# Altium PCB BCM_ECU_revA_V3.PcbDoc (part 5 of 7)
Units mm, origin at the board's own origin, x right, y up, seen from the top; angles counter-clockwise.
Board outline 109.5 x 156 mm, 4 copper layers (TOP SIG, GND, PWR, BOT SIG), stack 0.603 mm thick; 580 components, 446 nets, 1965 pads, 870 vias.
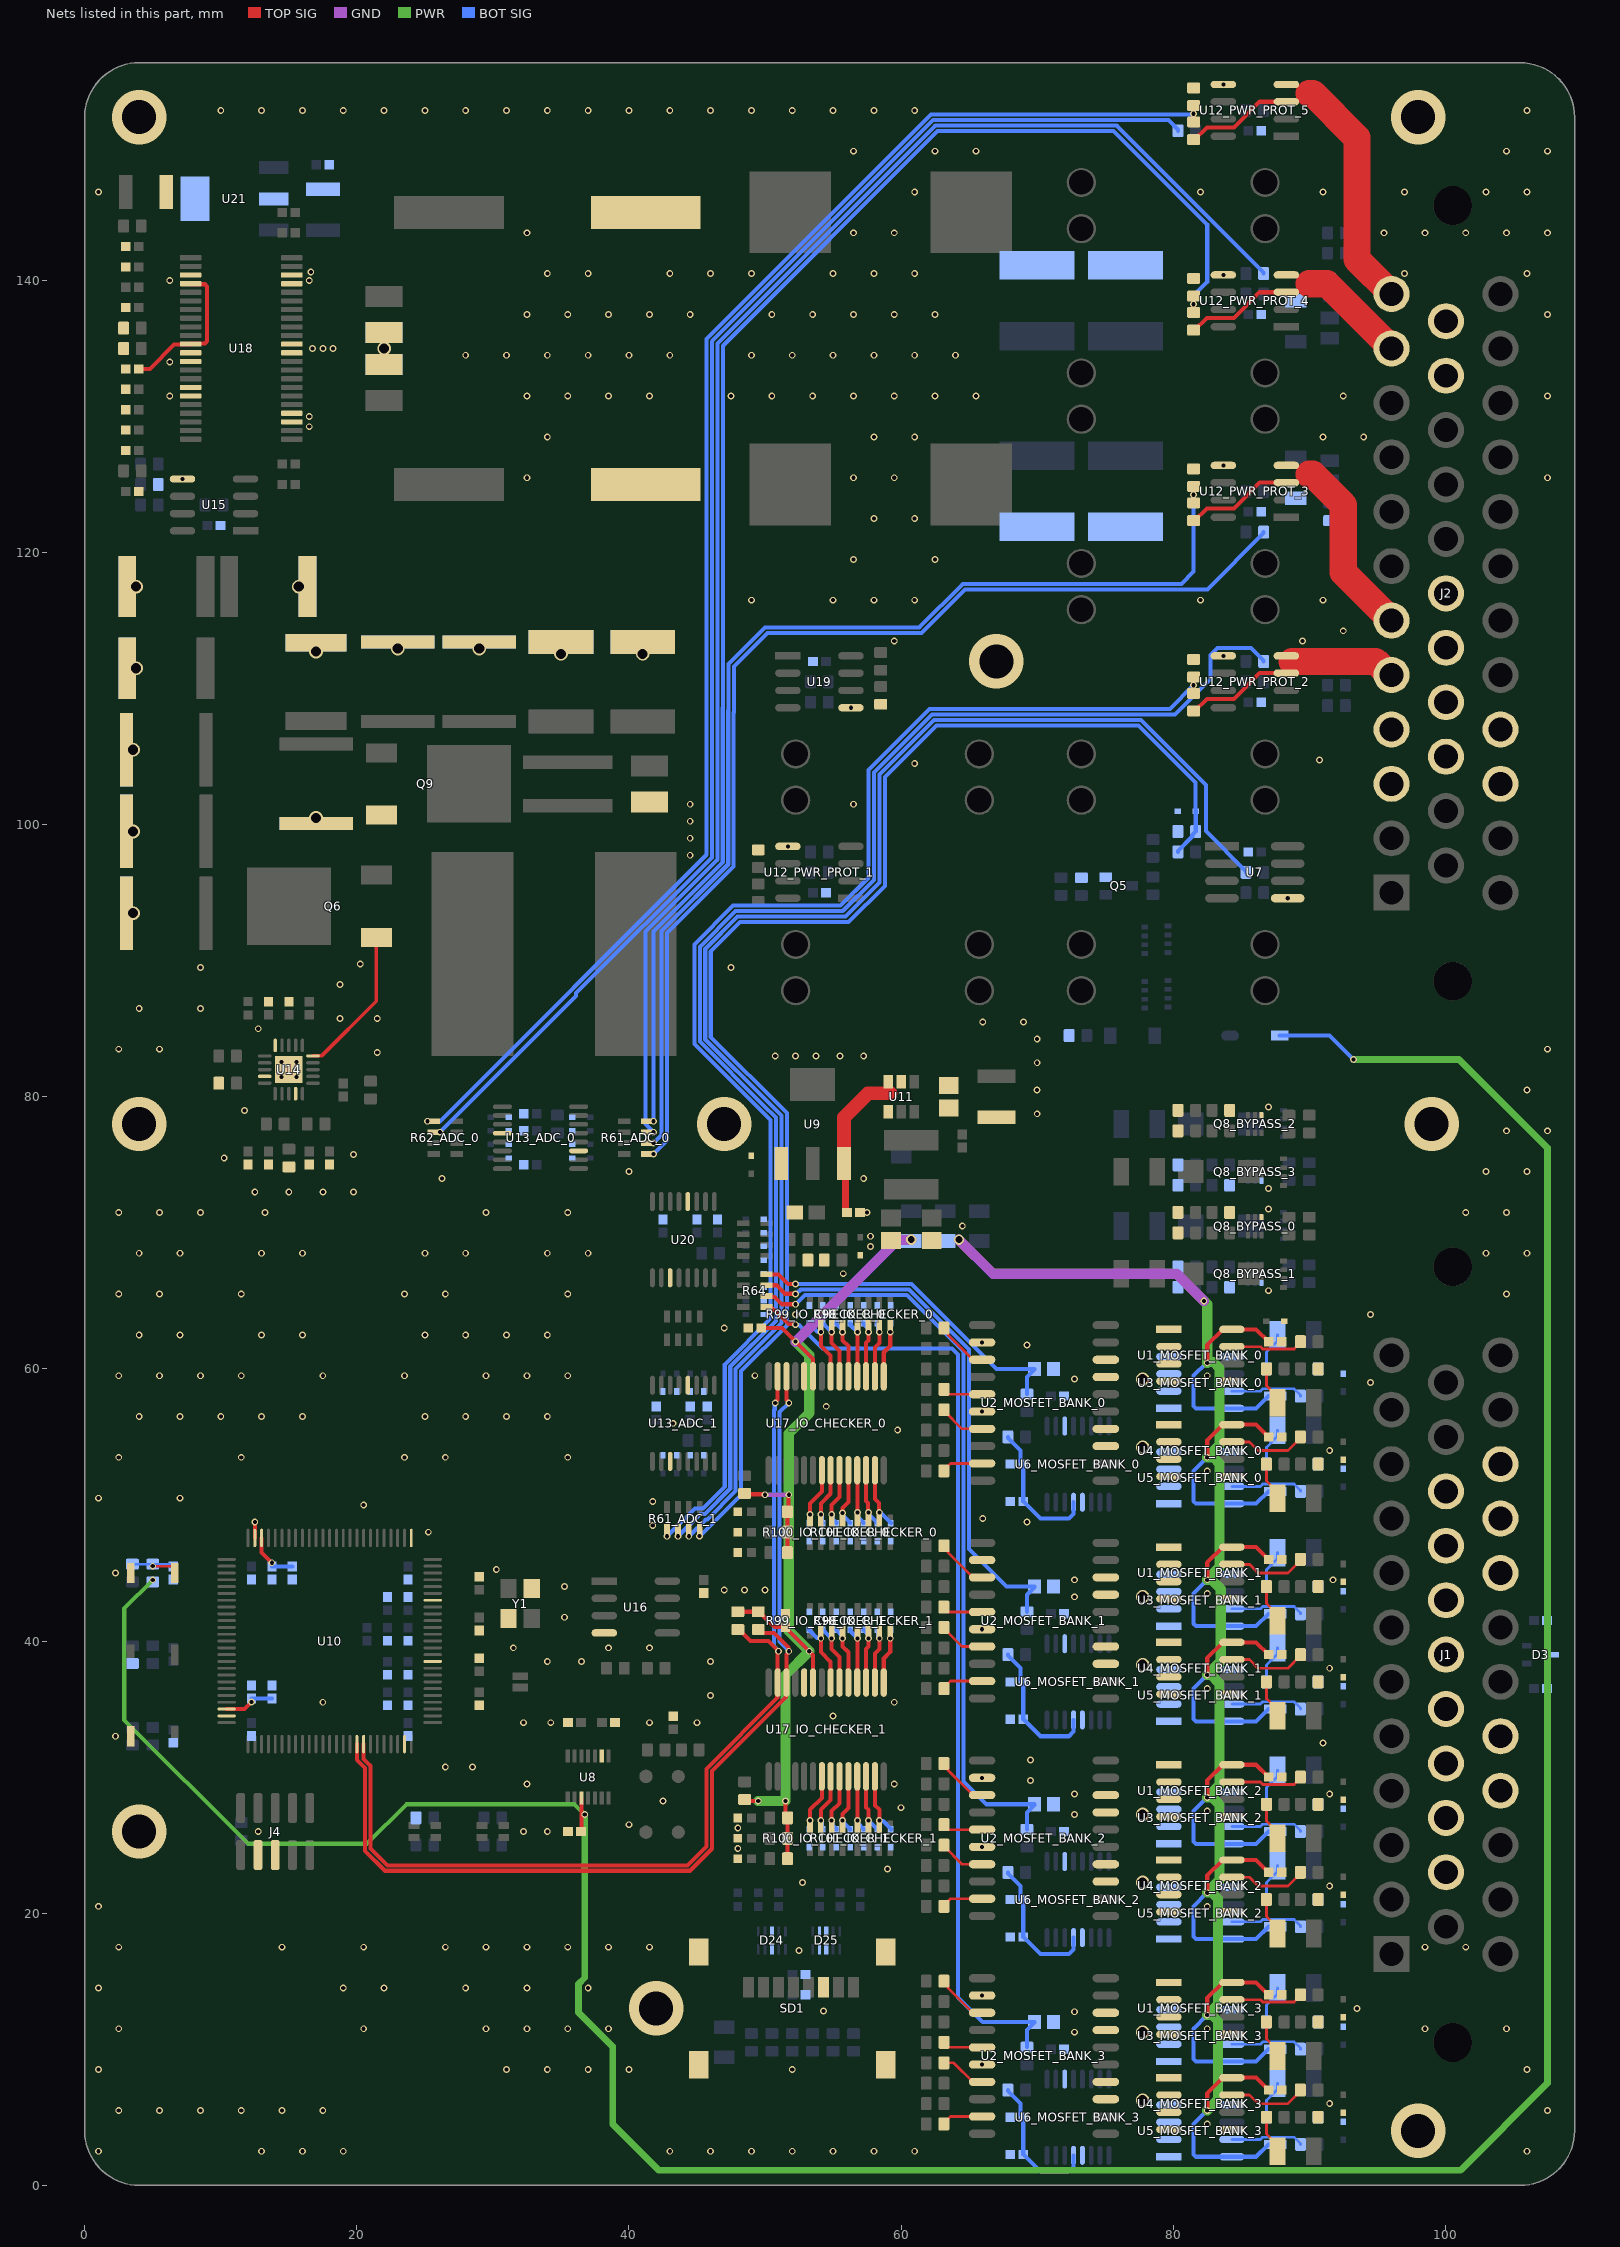
[diagram p6: the nets of this part, all layers, seen from the top]

## Via types
v1: diameter 0.5, hole 0.3, TOP SIG to BOT SIG, tented both sides, 797 vias
v2: diameter 1, hole 0.75, TOP SIG to BOT SIG, tented both sides, 56 vias
v3: diameter 4, hole 2.5, TOP SIG to BOT SIG, 9 vias
v4: diameter 0.75, hole 0.5, TOP SIG to BOT SIG, tented both sides, 6 vias
v5: diameter 2, hole 1.75, TOP SIG to BOT SIG, tented both sides, 2 vias

## Nets (pads, with @x,y where several pads share a name; then routed paths per layer and width w, separated by ;. In a path a pad name is that pad's centre, name@x,y a point inside that pad or via, vN(x,y) a via of type N, cw(c..) or ccw(c..) an arc to the next point about the centre after c; other vN are vias at no path point) (continued)
GND: C1_MOSFET_BANK_0.2 C1_MOSFET_BANK_1.2 C1_MOSFET_BANK_2.2 C1_MOSFET_BANK_3.2 C2_MOSFET_BANK_0.2 C2_MOSFET_BANK_1.2 C2_MOSFET_BANK_2.2 C2_MOSFET_BANK_3.2 C3_MOSFET_BANK_0.2 C3_MOSFET_BANK_1.2 C3_MOSFET_BANK_2.2 C3_MOSFET_BANK_3.2 C4_MOSFET_BANK_0.2 C4_MOSFET_BANK_1.2 C4_MOSFET_BANK_2.2 C4_MOSFET_BANK_3.2 C5_MOSFET_BANK_0.2 C5_MOSFET_BANK_1.2 C5_MOSFET_BANK_2.2 C5_MOSFET_BANK_3.2 C6_MOSFET_BANK_0.2 C6_MOSFET_BANK_1.2 C6_MOSFET_BANK_2.2 C6_MOSFET_BANK_3.2 C7_MOSFET_BANK_0.2 C7_MOSFET_BANK_1.2 C7_MOSFET_BANK_2.2 C7_MOSFET_BANK_3.2 C8.2 C9.2 C10.2 C11.2 C12.2 C13.2 C14.1 C15.2 C16.2 C17.1 C18.2 C19.2 C20.2 C21.2 C23.2 C24.2 C25.2 C26.2 C27.2 C28.2 C29.2 C30.2 C31.2 C32.2 C33.2 C34.2 C35.2 C36.2 C37.2 C38.2 C39.2 C40_PWR_PROT_1.2 C40_PWR_PROT_2.2 C40_PWR_PROT_3.2 C40_PWR_PROT_4.2 C40_PWR_PROT_5.2 C41.1 C43_IO_CHECKER_0.2 C43_IO_CHECKER_1.2 C46.2 C47.2 C48.2 C49_ADC_0.2 C49_ADC_1.2 C50_ADC_0.2 C50_ADC_1.2 C51_ADC_0.2 C51_ADC_1.2 C53.2 C54.2 C55.2 C56.2 C57.2 C58.2 C59.2 C60.2 C61.2 C62.2 C64.2 C65.2 C66.2 C67.2 C68.2 C69.2 C70.2 C71.2 C72.2 C73.2 C74.2 C75.2 C76.2 C77.2 C79.2 C83.2 C84.2 C85.2 C87.1 C88.2 C89.2 C90.2 C91.1 C92.2 C93.2 C94.2 C95.1 C96.2 C97.1 C98.1 C99.1 C100.1 C101.1 C102.2 C103.2 C104.2 C105.2 C106.2 C107.2 C108.2 C109.2 C110.2 C111.2 C112.2 C113.2 C114.2 C115.2 C116.2 C117.1 C118.2 C119.1 C120.1 D3.3 D6_PWR_PROT_1.2 D6_PWR_PROT_2.2 D6_PWR_PROT_3.2 D6_PWR_PROT_4.2 D6_PWR_PROT_5.2 D8.2 D9_IO_CHECKER_0.2 D9_IO_CHECKER_1.2 D10_IO_CHECKER_0.2 D10_IO_CHECKER_1.2 D11_IO_CHECKER_0.2 D11_IO_CHECKER_1.2 D12_IO_CHECKER_0.2 D12_IO_CHECKER_1.2 D13_IO_CHECKER_0.2 D13_IO_CHECKER_1.2 D14_IO_CHECKER_0.2 D14_IO_CHECKER_1.2 D15_IO_CHECKER_0.2 D15_IO_CHECKER_1.2 D16_IO_CHECKER_0.2 D16_IO_CHECKER_1.2 D17_IO_CHECKER_0.2 D17_IO_CHECKER_1.2 D18_IO_CHECKER_0.2 D18_IO_CHECKER_1.2 D19_IO_CHECKER_0.2 D19_IO_CHECKER_1.2 D20_IO_CHECKER_0.2 D20_IO_CHECKER_1.2 D21_IO_CHECKER_0.2 D21_IO_CHECKER_1.2 D22_IO_CHECKER_0.2 D22_IO_CHECKER_1.2 D23.2 D24.3 D24.8 D25.2 D25.3 D25.8 D25.9 D26_ADC_0.2 D26_ADC_1.2 D27_ADC_0.2 D27_ADC_1.2 D28_ADC_0.2 D28_ADC_1.2 D29_ADC_0.2 D29_ADC_1.2 D30_ADC_0.2 D30_ADC_1.2 D31_ADC_0.2 D31_ADC_1.2 D32_ADC_0.2 D32_ADC_1.2 D33_ADC_0.2 D33_ADC_1.2 D34.2 D35.2 D36.2 D37.2 D38.2 D39.2 D40.2 D41_MOSFET_BANK_0.2 D41_MOSFET_BANK_1.2 D41_MOSFET_BANK_2.2 D41_MOSFET_BANK_3.2 D42_MOSFET_BANK_0.2 D42_MOSFET_BANK_1.2 D42_MOSFET_BANK_2.2 D42_MOSFET_BANK_3.2 D43_MOSFET_BANK_0.2 D43_MOSFET_BANK_1.2 D43_MOSFET_BANK_2.2 D43_MOSFET_BANK_3.2 D44_MOSFET_BANK_0.2 D44_MOSFET_BANK_1.2 D44_MOSFET_BANK_2.2 D44_MOSFET_BANK_3.2 D45.2 D46.2 D47.2 J1.14 J1.15 J1.16 J1.17 J1.18 J1.19 J1.20 J1.21 J1.27 J1.28 J1.31 J1.32 J1.33 J2.3 J2.4 J2.15 J2.16 J2.17 J2.18 J2.22 J2.23 J2.26 J2.27 J4.3 J4.5 Q5.2 Q8_BYPASS_0.1 Q8_BYPASS_1.1 Q8_BYPASS_2.1 Q8_BYPASS_3.1 Q9.3 R11_MOSFET_BANK_0.1 R11_MOSFET_BANK_1.1 R11_MOSFET_BANK_2.1 R11_MOSFET_BANK_3.1 R22_MOSFET_BANK_0.2 R22_MOSFET_BANK_1.2 R22_MOSFET_BANK_2.2 R22_MOSFET_BANK_3.2 R23_MOSFET_BANK_0.2 R23_MOSFET_BANK_1.2 R23_MOSFET_BANK_2.2 R23_MOSFET_BANK_3.2 R24_MOSFET_BANK_0.2 R24_MOSFET_BANK_1.2 R24_MOSFET_BANK_2.2 R24_MOSFET_BANK_3.2 R25_MOSFET_BANK_0.2 R25_MOSFET_BANK_1.2 R25_MOSFET_BANK_2.2 R25_MOSFET_BANK_3.2 R27.1 R31.1 R32.1 R41.1 R45.1 R49_PWR_PROT_1.2 R49_PWR_PROT_2.2 R49_PWR_PROT_3.2 R49_PWR_PROT_4.2 R49_PWR_PROT_5.2 R51.2 R57_BYPASS_0.2 R57_BYPASS_1.2 R57_BYPASS_2.2 R57_BYPASS_3.2 R59_BYPASS_0.1 R59_BYPASS_1.1 R59_BYPASS_2.1 R59_BYPASS_3.1 R93.2 R94.2 R102_IO_CHECKER_0.1 R102_IO_CHECKER_1.1 R103_IO_CHECKER_0.1 R103_IO_CHECKER_1.1 R104_IO_CHECKER_0.1 R104_IO_CHECKER_1.1 R106.2 R110.2 R126.2 R130.1 R131.1 R132.2 R133.2 SD1.6 SD1.9 SD1.10 SD1.11 SD1.12 SW1.1 SW3.2 U1_MOSFET_BANK_0.5 U1_MOSFET_BANK_1.5 U1_MOSFET_BANK_2.5 U1_MOSFET_BANK_3.5 U2_MOSFET_BANK_0.2 U2_MOSFET_BANK_0.6 U2_MOSFET_BANK_1.2 U2_MOSFET_BANK_1.6 U2_MOSFET_BANK_2.2 U2_MOSFET_BANK_2.6 U2_MOSFET_BANK_3.2 U2_MOSFET_BANK_3.6 U3_MOSFET_BANK_0.5 U3_MOSFET_BANK_1.5 U3_MOSFET_BANK_2.5 U3_MOSFET_BANK_3.5 U4_MOSFET_BANK_0.5 U4_MOSFET_BANK_1.5 U4_MOSFET_BANK_2.5 U4_MOSFET_BANK_3.5 U5_MOSFET_BANK_0.5 U5_MOSFET_BANK_1.5 U5_MOSFET_BANK_2.5 U5_MOSFET_BANK_3.5 U6_MOSFET_BANK_0.3 U6_MOSFET_BANK_0.12 U6_MOSFET_BANK_1.3 U6_MOSFET_BANK_1.12 U6_MOSFET_BANK_2.3 U6_MOSFET_BANK_2.12 U6_MOSFET_BANK_3.3 U6_MOSFET_BANK_3.12 U7.5 U8.2 U9.1 U10.10 U10.19 U10.26 U10.49 U10.74 U10.99 U11.4 U12_PWR_PROT_1.5 U12_PWR_PROT_2.5 U12_PWR_PROT_3.5 U12_PWR_PROT_4.5 U12_PWR_PROT_5.5 U13_ADC_0.3 U13_ADC_0.12 U13_ADC_1.3 U13_ADC_1.12 U14.10 U14.14 U14.19 U14.21 U15.5 U16.4 U17_IO_CHECKER_0.10 U17_IO_CHECKER_1.10 U18.3 U18.12 U18.13 U18.16 U18.17 U18.25 U18.26 U18.33 U18.34 U18.41 U18.42 U19.5 U20.3 U20.12 U21.2 U21.4 Y1.2 Y1.4 | length 1.2
  TOP SIG w0.3: U10.49@12.5,47.575 v1(12.5,48.75)
  other v1: 1,2.5 13,2.5 16,2.5 19,2.5 43,2.5 46,2.5 49,2.5 52,2.5 55,2.5 58,2.5 61,2.5 106,2.5 82.5,4.5 2.5,5.5 5.5,5.5 8.5,5.5 11.5,5.5 14.5,5.5 17.5,5.5 107.5,5.5 91.5,6 1,8.5 31,8.5 34,8.5 37,8.5 40,8.5 52,8.5 106,8.5 65.95,8.865 72.75,11.25 2.5,11.5 20.5,11.5 29.5,11.5 32.5,11.5 35.5,11.5 38.5,11.5 82.5,11.5 98.5,11.5 104.5,11.5 72.75,12.75 54.295,12.8 93.5,13 65.95,13.945 1,14.5 19,14.5 22,14.5 28,14.5 32.5,14.5 37,14.5 52.5,17.25 2.5,17.5 14.5,17.5 20.5,17.5 26.5,17.5 29.5,17.5 32.5,17.5 35.5,17.5 38.5,17.5 41.5,17.5 98.5,17.5 101.5,17.5 1,20.5 82.5,20.5 91.5,22 52.75,22.25 59,23.25 48,24.75 65.95,24.865 12.75,26 32.25,26 34,26 48,26.25 40,26.5 72.75,27.25 82.5,27.5 60,27.75 42.5,28.25 72.75,28.75 91.5,28.75 32.5,29.5 59.5,29.5 69.5,29.75 65.95,29.945 26.5,30.75 28.5,30.75 69.5,31.25 91,32.5 2.25,33 32.25,34 34.25,34 41.5,34 45,34 55,34.5 17.5,35.5 59.5,35.5 46,36 82.5,36.5 91.5,38 34,38.5 36.5,38.5 46,38.5 31.5,39.5 38.5,39.5 41.5,39.5 65.95,40.865 35.25,41.75 72.75,43.25 82.5,43.5 47,43.75 48.5,43.75 50,43.75 35.25,44 72.75,44.5 91.75,44.5 2.25,45 30.25,45.25 25.25,48 41.75,48.5 69.25,48.75 66,49 20.5,50 41.75,50.25 1,50.5 7,50.5 82.5,52.5 2.5,53.5 11.5,53.5 23.5,53.5 26.5,53.5 35.5,53.5 91.5,54 59.75,55.5 43.25,56 4,56.5 7,56.5 10,56.5 13,56.5 16,56.5 25,56.5 28,56.5 31,56.5 34,56.5 65.95,56.865 54.5,57.25 94.5,59 72.75,59.25 2.5,59.5 5.5,59.5 8.5,59.5 11.5,59.5 17.5,59.5 23.5,59.5 29.5,59.5 32.5,59.5 35.5,59.5 49.25,59.5 82.5,59.5 69.25,61.75 65.95,61.945 4,62.5 7,62.5 13,62.5 16,62.5 25,62.5 28,62.5 31,62.5 34,62.5 47,63 52.25,64 94.5,64 2.5,65.5 5.5,65.5 11.5,65.5 23.5,65.5 26.5,65.5 35.5,65.5 104.5,65.5 87,65.75 55.75,67 4,68.5 7,68.5 13,68.5 16,68.5 25,68.5 28,68.5 34,68.5 37,68.5 103,68.5 106,68.5 57.75,69 57.75,69.75 64.5,70.5 2.5,71.5 5.5,71.5 8.5,71.5 13.25,71.5 29.5,71.5 35.5,71.5 57.5,71.5 101.5,71.5 104.5,71.5 87,71.75 12.5,73 15,73 17.5,73 19.75,73 87,73.25 26.25,74 57.25,74 40,74.5 103,74.5 106,74.5 10.25,75.5 19.75,75.75 104.5,77.5 107.5,77.5 70,78.75 11.75,79 87,79.25 70,80.5 106,80.5 14.45,81.45 15.55,81.45 70,82.5 14.45,82.55 15.55,82.55 50.75,83 52.25,83 53.75,83 55.5,83 57.25,83 21.5,83.25 2.5,83.5 5.5,83.5 107.5,83.5 70,84.25 12.75,85 66,85.5 69,85.5 18.75,85.75 21.5,85.75 4,86.5 8.5,86.5 18.75,88.25 8.5,89.5 47.5,89.5 20.25,89.75 88.416,94.595 44.5,97.75 51.684,98.405 44.5,99 44.5,100.25 44.5,101.5 56.5,101.5 61,104.5 90.75,104.75 56.316,108.595 83.684,112.405 59.5,113.5 89.5,113.5 92.5,114.25 49,116.5 55,116.5 58,116.5 61,116.5 82,116.5 91,116.5 56.5,119.5 62.5,119.5 58,122.5 61,122.5 7.184,125.405 32.5,125.5 56.5,125.5 59.5,125.5 107.5,125.5 83.684,126.405 34,128.5 58,128.5 61,128.5 91,128.5 94,128.5 16.5,129.25 16.5,130 6.25,131.5 32.5,131.5 35.5,131.5 38.5,131.5 41.5,131.5 47.5,131.5 50.5,131.5 53.5,131.5 56.5,131.5 59.5,131.5 62.5,131.5 65.5,131.5 92.5,131.5 107.5,131.5 6.25,134 28,134.5 31,134.5 34,134.5 37,134.5 40,134.5 43,134.5 49,134.5 52,134.5 55,134.5 58,134.5 61,134.5 64,134.5 16.75,135 17.5,135 18.25,135 32.5,137.5 35.5,137.5 38.5,137.5 41.5,137.5 44.5,137.5 50.5,137.5 53.5,137.5 56.5,137.5 59.5,137.5 62.5,137.5 107.5,137.5 6.25,140 16.5,140 83.684,140.405 34,140.5 37,140.5 43,140.5 46,140.5 49,140.5 55,140.5 58,140.5 61,140.5 97,140.5 106,140.5 16.616,140.616 32.5,143.5 56.5,143.5 59.5,143.5 95.5,143.5 98.5,143.5 101.5,143.5 104.5,143.5 107.5,143.5 1,146.5 61,146.5 82,146.5 91,146.5 97,146.5 103,146.5 106,146.5 56.5,149.5 62.5,149.5 65.5,149.5 104.5,149.5 107.5,149.5 10,152.5 13,152.5 16,152.5 19,152.5 22,152.5 25,152.5 28,152.5 31,152.5 34,152.5 37,152.5 40,152.5 43,152.5 46,152.5 49,152.5 52,152.5 55,152.5 58,152.5 61,152.5 106,152.5 83.684,154.405
  other v2: 3.552,93.5 3.552,99.5 17,100.5 3.552,105.5 3.775,111.5 35,112.55 41,112.55 17,112.725 23,112.948 29,112.948 3.775,117.5 15.725,117.5 22,135
  other v3: 98,4 42,13 4,26 4,78 47,78 99,78 67,112 4,152 98,152
GPA0_IO_CHECKER_0: D19_IO_CHECKER_0.1 R100_IO_CHECKER_0.8 U17_IO_CHECKER_0.21 | length 4.7
  TOP SIG w0.3: R100_IO_CHECKER_0.8@53.3,48.85 v1(53.3,49.3) 53.3,50.1 54.175,50.975 U17_IO_CHECKER_0.21@54.175,52.55
  BOT SIG w0.3: D19_IO_CHECKER_0.1@53.25,48.66 53.275,48.685 53.275,49.275 v1(53.3,49.3)
GPA0_IO_CHECKER_1: D19_IO_CHECKER_1.1 R100_IO_CHECKER_1.8 U17_IO_CHECKER_1.21 | length 4.7
  TOP SIG w0.3: R100_IO_CHECKER_1.8@53.3,26.35 v1(53.3,26.8) 53.3,27.6 54.175,28.475 U17_IO_CHECKER_1.21@54.175,30.05
  BOT SIG w0.3: D19_IO_CHECKER_1.1@53.25,26.16 53.275,26.185 53.275,26.775 v1(53.3,26.8)
GPA1_IO_CHECKER_0: D18_IO_CHECKER_0.1 R100_IO_CHECKER_0.7 U17_IO_CHECKER_0.22 | length 4.7
  TOP SIG w0.3: R100_IO_CHECKER_0.7@54.1,48.85 v1(54.1,49.3) 54.1,50.1 54.825,50.825 U17_IO_CHECKER_0.22@54.825,52.55
  BOT SIG w0.3: v1(54.1,49.3) 54.1,49.246 54.2,49.146 54.2,48.71 D18_IO_CHECKER_0.1@54.25,48.66
GPA1_IO_CHECKER_1: D18_IO_CHECKER_1.1 R100_IO_CHECKER_1.7 U17_IO_CHECKER_1.22 | length 4.7
  TOP SIG w0.3: R100_IO_CHECKER_1.7@54.1,26.35 v1(54.1,26.8) 54.1,27.6 54.825,28.325 U17_IO_CHECKER_1.22@54.825,30.05
  BOT SIG w0.3: v1(54.1,26.8) 54.1,26.746 54.2,26.646 54.2,26.21 D18_IO_CHECKER_1.1@54.25,26.16
GPA2_IO_CHECKER_0: D17_IO_CHECKER_0.1 R100_IO_CHECKER_0.6 U17_IO_CHECKER_0.23 | length 4.7
  TOP SIG w0.3: R100_IO_CHECKER_0.6@54.9,48.85 v1(54.9,49.3) 54.9,50 55.475,50.575 U17_IO_CHECKER_0.23@55.475,52.55
  BOT SIG w0.3: v1(54.9,49.3) 54.938,49.262 54.938,49.012 55.25,48.7 D17_IO_CHECKER_0.1@55.25,48.66
GPA2_IO_CHECKER_1: D17_IO_CHECKER_1.1 R100_IO_CHECKER_1.6 U17_IO_CHECKER_1.23 | length 4.7
  TOP SIG w0.3: R100_IO_CHECKER_1.6@54.9,26.35 v1(54.9,26.8) 54.9,27.5 55.475,28.075 U17_IO_CHECKER_1.23@55.475,30.05
  BOT SIG w0.3: v1(54.9,26.8) 54.938,26.762 54.938,26.512 55.25,26.2 D17_IO_CHECKER_1.1@55.25,26.16
GPA3_IO_CHECKER_0: D16_IO_CHECKER_0.1 R100_IO_CHECKER_0.5 U17_IO_CHECKER_0.24 | length 4.9
  TOP SIG w0.3: R100_IO_CHECKER_0.5@55.7,48.85 55.695,48.855 55.695,49.4 v1(55.69,49.405) 55.69,49.79 56.125,50.225 U17_IO_CHECKER_0.24@56.125,52.55
  BOT SIG w0.3: v1(55.69,49.405) 55.728,49.367 55.728,49.222 56.2,48.75 56.2,48.71 D16_IO_CHECKER_0.1@56.25,48.66
GPA3_IO_CHECKER_1: D16_IO_CHECKER_1.1 R100_IO_CHECKER_1.5 U17_IO_CHECKER_1.24 | length 4.7
  TOP SIG w0.3: R100_IO_CHECKER_1.5@55.7,26.35 v1(55.7,26.8) 55.7,27.3 56.125,27.725 U17_IO_CHECKER_1.24@56.125,30.05
  BOT SIG w0.3: v1(55.7,26.8) 55.7,26.75 56.25,26.2 D16_IO_CHECKER_1.1@56.25,26.16
GPA4_IO_CHECKER_0: D22_IO_CHECKER_0.1 R101_IO_CHECKER_0.8 U17_IO_CHECKER_0.25 | length 4.7
  TOP SIG w0.3: U17_IO_CHECKER_0.25@56.775,52.55 56.787,52.537 56.787,49.467 v1(56.8,49.455) ; v1@56.787,49.455 56.8,49.442 R101_IO_CHECKER_0.8@56.8,48.85
  BOT SIG w0.3: v1(56.8,49.455) 56.838,49.417 56.838,49.112 57.2,48.75 57.2,48.71 D22_IO_CHECKER_0.1@57.25,48.66
GPA4_IO_CHECKER_1: D22_IO_CHECKER_1.1 R101_IO_CHECKER_1.8 U17_IO_CHECKER_1.25 | length 4.5
  TOP SIG w0.3: U17_IO_CHECKER_1.25@56.775,30.05 56.787,30.038 56.787,26.363 R101_IO_CHECKER_1.8@56.8,26.35
  BOT SIG w0.3: v1(56.8,26.8) 56.838,26.762 56.838,26.612 57.25,26.2 D22_IO_CHECKER_1.1@57.25,26.16
GPA5_IO_CHECKER_0: D21_IO_CHECKER_0.1 R101_IO_CHECKER_0.7 U17_IO_CHECKER_0.26 | length 4.8
  TOP SIG w0.3: U17_IO_CHECKER_0.26@57.425,52.55 57.425,50.305 57.575,50.155 57.575,49.48 v1(57.6,49.455) R101_IO_CHECKER_0.7@57.6,48.85
  BOT SIG w0.3: v1(57.6,49.455) 57.638,49.417 57.638,49.312 58.2,48.75 58.2,48.71 D21_IO_CHECKER_0.1@58.25,48.66
GPA5_IO_CHECKER_1: D21_IO_CHECKER_1.1 R101_IO_CHECKER_1.7 U17_IO_CHECKER_1.26 | length 4.7
  TOP SIG w0.3: U17_IO_CHECKER_1.26@57.425,30.05 57.425,27.775 57.6,27.6 v1(57.6,26.8) R101_IO_CHECKER_1.7@57.6,26.35
  BOT SIG w0.3: v1(57.6,26.8) 58.15,26.25 58.2,26.25 58.25,26.2 D21_IO_CHECKER_1.1@58.25,26.16
GPA6_IO_CHECKER_0: D20_IO_CHECKER_0.1 R101_IO_CHECKER_0.6 U17_IO_CHECKER_0.27 | length 5
  TOP SIG w0.3: U17_IO_CHECKER_0.27@58.075,52.55 58.075,50.425 58.362,50.138 58.362,49.493 v1(58.4,49.455) R101_IO_CHECKER_0.6@58.4,48.85
  BOT SIG w0.3: v1(58.4,49.455) 58.438,49.417 58.533,49.417 59.2,48.75 59.2,48.71 D20_IO_CHECKER_0.1@59.25,48.66
GPA6_IO_CHECKER_1: D20_IO_CHECKER_1.1 R101_IO_CHECKER_1.6 U17_IO_CHECKER_1.27 | length 5
  TOP SIG w0.3: U17_IO_CHECKER_1.27@58.075,30.05 58.075,27.925 58.4,27.6 v1(58.4,26.8) R101_IO_CHECKER_1.6@58.4,26.35
  BOT SIG w0.3: v1(58.4,26.8) 58.438,26.762 58.688,26.762 59.25,26.2 D20_IO_CHECKER_1.1@59.25,26.16
GPB0_IO_CHECKER_0: D12_IO_CHECKER_0.1 R98_IO_CHECKER_0.8 U17_IO_CHECKER_0.1 | length 4.6
  TOP SIG w0.3: U17_IO_CHECKER_0.1@58.725,59.45 58.725,61.225 59.2,61.7 v1(59.2,62.7) R98_IO_CHECKER_0.8@59.2,63.15
  BOT SIG w0.3: v1(59.2,62.7) 59.225,62.725 59.225,63.315 D12_IO_CHECKER_0.1@59.25,63.34
GPB0_IO_CHECKER_1: D12_IO_CHECKER_1.1 R98_IO_CHECKER_1.8 U17_IO_CHECKER_1.1 | length 4.6
  TOP SIG w0.3: U17_IO_CHECKER_1.1@58.725,36.95 58.725,38.725 59.2,39.2 v1(59.2,40.2) R98_IO_CHECKER_1.8@59.2,40.65
  BOT SIG w0.3: v1(59.2,40.2) 59.225,40.225 59.225,40.815 D12_IO_CHECKER_1.1@59.25,40.84
GPB1_IO_CHECKER_0: D11_IO_CHECKER_0.1 R98_IO_CHECKER_0.7 U17_IO_CHECKER_0.2 | length 4.5
  TOP SIG w0.3: U17_IO_CHECKER_0.2@58.075,59.45 58.075,61.575 58.4,61.9 v1(58.4,62.7) R98_IO_CHECKER_0.7@58.4,63.15
  BOT SIG w0.3: D11_IO_CHECKER_0.1@58.25,63.34 58.3,63.29 58.3,62.854 58.4,62.754 v1(58.4,62.7)
GPB1_IO_CHECKER_1: D11_IO_CHECKER_1.1 R98_IO_CHECKER_1.7 U17_IO_CHECKER_1.2 | length 4.5
  TOP SIG w0.3: U17_IO_CHECKER_1.2@58.075,36.95 58.075,39.075 58.4,39.4 v1(58.4,40.2) R98_IO_CHECKER_1.7@58.4,40.65
  BOT SIG w0.3: D11_IO_CHECKER_1.1@58.25,40.84 58.3,40.79 58.3,40.354 58.4,40.254 v1(58.4,40.2)
GPB2_IO_CHECKER_0: D10_IO_CHECKER_0.1 R98_IO_CHECKER_0.6 U17_IO_CHECKER_0.3 | length 4.6
  TOP SIG w0.3: U17_IO_CHECKER_0.3@57.425,59.45 57.425,61.925 57.6,62.1 v1(57.6,62.7) R98_IO_CHECKER_0.6@57.6,63.15
  BOT SIG w0.3: D10_IO_CHECKER_0.1@57.25,63.34 57.25,63.3 57.562,62.988 57.562,62.738 v1(57.6,62.7)
GPB2_IO_CHECKER_1: D10_IO_CHECKER_1.1 R98_IO_CHECKER_1.6 U17_IO_CHECKER_1.3 | length 4.6
  TOP SIG w0.3: U17_IO_CHECKER_1.3@57.425,36.95 57.425,39.425 57.6,39.6 v1(57.6,40.2) R98_IO_CHECKER_1.6@57.6,40.65
  BOT SIG w0.3: D10_IO_CHECKER_1.1@57.25,40.84 57.25,40.8 57.562,40.488 57.562,40.238 v1(57.6,40.2)
GPB3_IO_CHECKER_0: D9_IO_CHECKER_0.1 R98_IO_CHECKER_0.5 U17_IO_CHECKER_0.4 | length 4.6
  TOP SIG w0.3: U17_IO_CHECKER_0.4@56.775,59.45 56.787,59.462 56.787,63.137 R98_IO_CHECKER_0.5@56.8,63.15
  BOT SIG w0.3: D9_IO_CHECKER_0.1@56.25,63.34 56.3,63.29 56.3,63.2 v1(56.8,62.7)
GPB3_IO_CHECKER_1: D9_IO_CHECKER_1.1 R98_IO_CHECKER_1.5 U17_IO_CHECKER_1.4 | length 4.6
  TOP SIG w0.3: U17_IO_CHECKER_1.4@56.775,36.95 56.787,36.963 56.787,40.638 R98_IO_CHECKER_1.5@56.8,40.65
  BOT SIG w0.3: D9_IO_CHECKER_1.1@56.25,40.84 56.3,40.79 56.3,40.7 v1(56.8,40.2)
GPB4_IO_CHECKER_0: D15_IO_CHECKER_0.1 R99_IO_CHECKER_0.8 U17_IO_CHECKER_0.5 | length 4.7
  TOP SIG w0.3: R99_IO_CHECKER_0.8@55.7,63.15 55.7,62.1 56.125,61.675 U17_IO_CHECKER_0.5@56.125,59.45
  BOT SIG w0.3: D15_IO_CHECKER_0.1@55.25,63.34 55.25,63.3 55.666,62.884 55.666,62.738 v1(55.704,62.7)
GPB4_IO_CHECKER_1: D15_IO_CHECKER_1.1 R99_IO_CHECKER_1.8 U17_IO_CHECKER_1.5 | length 4.7
  TOP SIG w0.3: R99_IO_CHECKER_1.8@55.7,40.65 55.7,39.6 56.125,39.175 U17_IO_CHECKER_1.5@56.125,36.95
  BOT SIG w0.3: D15_IO_CHECKER_1.1@55.25,40.84 55.25,40.8 55.666,40.384 55.666,40.238 v1(55.704,40.2)
GPB5_IO_CHECKER_0: D14_IO_CHECKER_0.1 R99_IO_CHECKER_0.7 U17_IO_CHECKER_0.6 | length 4.9
  TOP SIG w0.3: R99_IO_CHECKER_0.7@54.9,63.15 v1(54.9,62.7) 54.9,61.9 55.475,61.325 U17_IO_CHECKER_0.6@55.475,59.45
  BOT SIG w0.3: D14_IO_CHECKER_0.1@54.25,63.34 54.25,63.3 54.3,63.25 54.35,63.25 v1(54.9,62.7)
GPB5_IO_CHECKER_1: D14_IO_CHECKER_1.1 R99_IO_CHECKER_1.7 U17_IO_CHECKER_1.6 | length 4.9
  TOP SIG w0.3: R99_IO_CHECKER_1.7@54.9,40.65 v1(54.9,40.2) 54.9,39.4 55.475,38.825 U17_IO_CHECKER_1.6@55.475,36.95
  BOT SIG w0.3: D14_IO_CHECKER_1.1@54.25,40.84 54.25,40.8 54.3,40.75 54.35,40.75 v1(54.9,40.2)
GPB6_IO_CHECKER_0: D13_IO_CHECKER_0.1 R99_IO_CHECKER_0.6 U17_IO_CHECKER_0.7 | length 5.1
  TOP SIG w0.3: R99_IO_CHECKER_0.6@54.1,63.15 v1(54.1,62.7) 54.1,61.7 54.825,60.975 U17_IO_CHECKER_0.7@54.825,59.45
  BOT SIG w0.3: D13_IO_CHECKER_0.1@53.25,63.34 53.25,63.3 53.812,62.738 54.062,62.738 v1(54.1,62.7)
GPB6_IO_CHECKER_1: D13_IO_CHECKER_1.1 R99_IO_CHECKER_1.6 U17_IO_CHECKER_1.7 | length 5.1
  TOP SIG w0.3: R99_IO_CHECKER_1.6@54.1,40.65 v1(54.1,40.2) 54.1,39.2 54.825,38.475 U17_IO_CHECKER_1.7@54.825,36.95
  BOT SIG w0.3: D13_IO_CHECKER_1.1@53.25,40.84 53.25,40.8 53.812,40.238 54.062,40.238 v1(54.1,40.2)
HO: Q6.1 U14.5 | length 11
  TOP SIG w0.254: U14.5@16.775,83 17.4,83 21.435,87.035 Q6.1@21.435,91.714
INH_EXT_0: R58_BYPASS_0.2
INH_EXT_1: R58_BYPASS_1.2
INH_EXT_2: R58_BYPASS_2.2
INH_EXT_3: R58_BYPASS_3.2
IO_CHECKER_3V3: C43_IO_CHECKER_0.1 C43_IO_CHECKER_1.1 F11.2 R67.2 R68.2 R95_IO_CHECKER_0.2 R95_IO_CHECKER_1.2 R96_IO_CHECKER_0.2 R96_IO_CHECKER_1.2 R97_IO_CHECKER_0.2 R97_IO_CHECKER_1.2 R121_IO_CHECKER_0.2 R121_IO_CHECKER_1.2 U17_IO_CHECKER_0.9 U17_IO_CHECKER_1.9 | length 77.5
  TOP SIG w0.3: R67.2@48,42.15 R68.2@49.5,42.15 ; R121_IO_CHECKER_1.2@48.5,28.35 48.6,28.25 v1(49.5,28.25) ; R121_IO_CHECKER_0.2@48.5,50.85 48.562,50.788 49.962,50.788 v1(50,50.75) ; R68.2@49.575,42.15 50.703,41.022 C43_IO_CHECKER_1.1@51.5,41.022 ; C43_IO_CHECKER_0.1@49.729,63 51.25,63 v1(52.25,62) 53.525,60.725 U17_IO_CHECKER_0.9@53.525,59.45 ; v1(51.5,28.25) 51.5,27.15 R95_IO_CHECKER_1.2@51.65,27 R96_IO_CHECKER_1.2@51.65,25.5 R97_IO_CHECKER_1.2@51.65,24 ; C43_IO_CHECKER_1.1@51.5,41 53.525,38.975 U17_IO_CHECKER_1.9@53.525,36.95 ; R97_IO_CHECKER_0.2@51.65,46.5 R96_IO_CHECKER_0.2@51.65,48 R95_IO_CHECKER_0.2@51.65,49.5 51.712,49.562 51.712,50.712 v1(51.75,50.75)
  GND w0.3: v1(50,50.75) v1(51.75,50.75)
  GND w0.75: v1(52.25,62) 59.75,69.5 v4(60.75,69.5)
  PWR w0.75: v1(49.5,28.25) v1(51.5,28.25) 51.5,37.5 v1(53.25,39.25) 51.75,40.75 v1(51.75,50.75) 51.75,55.25 53.25,56.75 53.25,61 v1(52.25,62)
IO_CHKR_SCL: R68.1 U10.92 U17_IO_CHECKER_0.12 U17_IO_CHECKER_1.12 | length 75.6
  TOP SIG w0.3: U10.92@20,32.425 20,31.272 20.608,30.664 20.608,28.336 20.613,28.331 20.613,27.499 20.613,26.569 20.613,25.569 20.613,24.574 22.072,23.114 23.068,23.114 24.068,23.114 24.997,23.114 44.479,23.114 46.097,24.733 46.097,30.433 51.546,35.882 51.546,36.921 U17_IO_CHECKER_1.12@51.575,36.95 51.575,39.021 51.75,39.196 v1(51.75,39.25) 51.712,39.288 51.712,39.538 50.65,40.6 49.825,40.6 49.575,40.85 R68.1@49.5,40.85 ; U17_IO_CHECKER_0.12@51.575,59.45 51.575,57.729 51.75,57.554 v1(51.75,57.5)
  BOT SIG w0.3: v1(51.75,39.25) 51.75,39.278 51.075,39.953 51.075,56.825 v1(51.75,57.5)
IO_CHKR_SDA: R67.1 U10.93 U17_IO_CHECKER_0.13 U17_IO_CHECKER_1.13 | length 74.3
  TOP SIG w0.3: U10.93@20.5,32.425 20.5,31.34 21.01,30.83 21.01,28.502 21.014,28.497 21.014,24.74 22.238,23.516 44.312,23.516 45.695,24.899 45.695,30.599 50.896,35.8 50.896,36.921 U17_IO_CHECKER_1.13@50.925,36.95 50.925,39.121 51,39.196 v1(51,39.25) 50.25,40 48.925,40 48.075,40.85 R67.1@48,40.85 ; v1(50.75,57.5) 50.75,57.554 50.925,57.729 U17_IO_CHECKER_0.13@50.925,59.45
  BOT SIG w0.3: v1(50.75,57.5) 50.712,57.462 50.712,57.03 50.673,56.991 50.673,39.631 51,39.304 v1(51,39.25)
LED_A: J2.5 R47_PWR_PROT_2.1 U12_PWR_PROT_2.3 U12_PWR_PROT_2.4 | length 15.7
  TOP SIG w0.3: R47_PWR_PROT_2.1@81.5,108.35 81.575,108.35 82.475,109.25 84.474,109.25 86.359,111.135 U12_PWR_PROT_2.3@88.316,111.135
  TOP SIG w2: 88.721,112 94.874,112 95.874,111 J2.5@96.05,111
LED_A_I_SENSE: R52_PWR_PROT_2.1 R61_ADC_1.2 | length 105.5
  BOT SIG w0.3: v1(43.6,47.702) 43.602,47.702 45.248,49.348 45.594,49.348 47.442,51.196 47.442,60.168 50.803,63.529 50.803,71.471 50.797,71.477 50.797,78.467 49.902,79.363 45.205,84.059 45.205,91.025 47.823,93.644 55.711,93.644 58.003,95.935 58.003,103.839 62.263,108.098 80.126,108.098 82.732,110.705 82.732,112.482 83.25,113 85.725,113 86.65,112.075 R52_PWR_PROT_2.1@86.65,112
LED_A_V_SENSE: D6_PWR_PROT_2.1 R47_PWR_PROT_2.2 R49_PWR_PROT_2.1 R61_ADC_1.1 | length 100.3
  TOP SIG w0.3: R47_PWR_PROT_2.2@81.5,109.65 v1(81.5,110.25) R49_PWR_PROT_2.1@81.5,110.85
  BOT SIG w0.3: v1(42.8,47.702) 42.802,47.702 44.85,49.75 45.428,49.75 47.04,51.363 47.04,60.335 50.402,63.696 50.402,71.304 50.395,71.311 50.395,78.301 44.803,83.893 44.803,91.192 47.657,94.045 55.545,94.045 57.6,96.1 57.6,97.2 57.602,97.202 57.602,104.005 62.096,108.5 79.75,108.5 v1(81.5,110.25) D6_PWR_PROT_2.1@81.5,110.84
LED_B: J2.6 R47_PWR_PROT_3.1 U12_PWR_PROT_3.3 U12_PWR_PROT_3.4 | length 21.4
  TOP SIG w0.3: R47_PWR_PROT_3.1@81.5,122.35 81.575,122.35 82.475,123.25 84.474,123.25 86.359,125.135 U12_PWR_PROT_3.3@88.316,125.135
  TOP SIG w2: 90,125.75 90.25,125.75 92.5,123.5 92.5,118.55 J2.6@96.05,115
LED_B_I_SENSE: R52_PWR_PROT_3.1 R61_ADC_0.1 | length 81.4
  BOT SIG w0.3: v1(41.8,75.8) 42.795,76.795 42.795,92.023 47.697,96.925 47.697,108.233 47.706,108.242 47.706,111.638 50.166,114.098 61.498,114.098 64.7,117.3 82.525,117.3 86.65,121.425 R52_PWR_PROT_3.1@86.65,121.5
LED_B_V_SENSE: D6_PWR_PROT_3.1 R47_PWR_PROT_3.2 R49_PWR_PROT_3.1 R61_ADC_0.2 | length 81.9
  TOP SIG w0.3: R47_PWR_PROT_3.2@81.5,123.65 v1(81.5,124.25) R49_PWR_PROT_3.1@81.5,124.85
  BOT SIG w0.3: v1(41.8,76.6) 42.394,77.194 42.394,92.19 47.295,97.091 47.295,108.399 47.305,108.409 47.305,111.805 50,114.5 61.332,114.5 64.534,117.702 80.602,117.702 81.5,118.6 v1(81.5,124.25) D6_PWR_PROT_3.1@81.5,124.84
LED_C: J2.11 R47_PWR_PROT_4.1 U12_PWR_PROT_4.3 U12_PWR_PROT_4.4 | length 16
  TOP SIG w0.3: R47_PWR_PROT_4.1@81.5,136.35 81.575,136.35 82.475,137.25 84.474,137.25 86.359,139.135 U12_PWR_PROT_4.3@88.316,139.135
  TOP SIG w2: 90,139.75 91.3,139.75 J2.11@96.05,135
LED_C_I_SENSE: R52_PWR_PROT_4.1 R61_ADC_0.3 | length 111.7
  BOT SIG w0.3: v1(41.797,77.4) 41.733,77.464 41.733,77.467 41.2,78 41.2,92.132 46.492,97.424 46.492,108.732 46.502,108.741 46.502,135.366 62.512,151.377 75.848,151.377 86.65,140.575 R52_PWR_PROT_4.1@86.65,140.5
LED_C_V_SENSE: D6_PWR_PROT_4.1 R47_PWR_PROT_4.2 R49_PWR_PROT_4.1 R61_ADC_0.4 | length 111.6
  TOP SIG w0.3: R47_PWR_PROT_4.2@81.5,137.65 v1(81.5,138.25) R49_PWR_PROT_4.1@81.5,138.85
  BOT SIG w0.3: v1(41.797,78.2) 41.797,92.161 46.894,97.258 46.894,108.565 46.903,108.575 46.903,135.199 62.679,150.975 75.625,150.975 82.5,144.1 82.5,139.88 81.5,138.88 D6_PWR_PROT_4.1@81.5,138.84 v1(81.5,138.25)
LED_D: J2.12 R47_PWR_PROT_5.1 U12_PWR_PROT_5.3 U12_PWR_PROT_5.4 | length 25.4
  TOP SIG w0.3: R47_PWR_PROT_5.1@81.5,150.35 81.575,150.35 82.475,151.25 84.474,151.25 86.359,153.135 U12_PWR_PROT_5.3@88.316,153.135
  TOP SIG w2: 90,153.75 90.005,153.745 90.255,153.745 93.5,150.5 93.5,141.55 J2.12@96.05,139
LED_D_I_SENSE: R52_PWR_PROT_5.1 R62_ADC_0.2 | length 107.8
  BOT SIG w0.3: v1(26.1,77.4) 36.114,87.414 36.114,87.614 46.09,97.59 46.09,108.898 46.1,108.908 46.1,135.532 62.346,151.778 79.647,151.778 80.35,151.075 R52_PWR_PROT_5.1@80.35,151
LED_D_V_SENSE: D6_PWR_PROT_5.1 R47_PWR_PROT_5.2 R49_PWR_PROT_5.1 R62_ADC_0.1 | length 111
  TOP SIG w0.3: R47_PWR_PROT_5.2@81.5,151.65 v1(81.5,152.25) R49_PWR_PROT_5.1@81.5,152.85
  BOT SIG w0.3: v1(25.2,78.2) 26.1,78.2 45.689,97.789 45.689,109.064 45.692,109.068 45.692,135.692 62.2,152.2 81.45,152.2 v1(81.5,152.25) D6_PWR_PROT_5.1@81.5,152.84
M1_I_SENSE_MOSFET_BANK_0: R17_MOSFET_BANK_0.2 U1_MOSFET_BANK_0.7 | length 5.4
  TOP SIG w0.2: U1_MOSFET_BANK_0.7@84.316,61.635 86.407,61.635 86.58,61.462 88.887,61.462 89.35,61.925 R17_MOSFET_BANK_0.2@89.35,62
M1_I_SENSE_MOSFET_BANK_1: R17_MOSFET_BANK_1.2 U1_MOSFET_BANK_1.7 | length 5.8
  TOP SIG w0.2: U1_MOSFET_BANK_1.7@84.316,45.635 84.328,45.623 85.627,45.623 86.25,45 88.425,45 89.35,45.925 R17_MOSFET_BANK_1.2@89.35,46
M1_I_SENSE_MOSFET_BANK_2: R17_MOSFET_BANK_2.2 U1_MOSFET_BANK_2.7 | length 5.4
  TOP SIG w0.2: U1_MOSFET_BANK_2.7@84.316,29.635 86.407,29.635 86.58,29.462 88.887,29.462 89.35,29.925 R17_MOSFET_BANK_2.2@89.35,30
M1_I_SENSE_MOSFET_BANK_3: R17_MOSFET_BANK_3.2 U1_MOSFET_BANK_3.7 | length 5.4
  TOP SIG w0.2: U1_MOSFET_BANK_3.7@84.316,13.635 86.407,13.635 86.58,13.462 88.887,13.462 89.35,13.925 R17_MOSFET_BANK_3.2@89.35,14
M1_OUT_MOSFET_BANK_0: F2_MOSFET_BANK_0.1 R18_MOSFET_BANK_0.2 U1_MOSFET_BANK_0.3 U1_MOSFET_BANK_0.4 | length 2.8
  TOP SIG w0.2: R18_MOSFET_BANK_0.2@86.85,60 86.85,58.761 87.666,57.945 F2_MOSFET_BANK_0.1@87.666,57.5
M1_OUT_MOSFET_BANK_1: F2_MOSFET_BANK_1.1 R18_MOSFET_BANK_1.2 U1_MOSFET_BANK_1.3 U1_MOSFET_BANK_1.4 | length 2.8
  TOP SIG w0.2: R18_MOSFET_BANK_1.2@86.85,44 86.85,42.761 87.666,41.945 F2_MOSFET_BANK_1.1@87.666,41.5
M1_OUT_MOSFET_BANK_2: F2_MOSFET_BANK_2.1 R18_MOSFET_BANK_2.2 U1_MOSFET_BANK_2.3 U1_MOSFET_BANK_2.4 | length 2.8
  TOP SIG w0.2: R18_MOSFET_BANK_2.2@86.85,28 86.85,26.761 87.666,25.945 F2_MOSFET_BANK_2.1@87.666,25.5
M1_OUT_MOSFET_BANK_3: F2_MOSFET_BANK_3.1 R18_MOSFET_BANK_3.2 U1_MOSFET_BANK_3.3 U1_MOSFET_BANK_3.4 | length 2.8
  TOP SIG w0.2: R18_MOSFET_BANK_3.2@86.85,12 86.85,10.761 87.666,9.945 F2_MOSFET_BANK_3.1@87.666,9.5
M1_PRE_SHUNT_MOSFET_BANK_0: U1_MOSFET_BANK_0.1 U1_MOSFET_BANK_0.2 U2_MOSFET_BANK_0.18
M1_PRE_SHUNT_MOSFET_BANK_1: U1_MOSFET_BANK_1.1 U1_MOSFET_BANK_1.2 U2_MOSFET_BANK_1.18
M1_PRE_SHUNT_MOSFET_BANK_2: U1_MOSFET_BANK_2.1 U1_MOSFET_BANK_2.2 U2_MOSFET_BANK_2.18
M1_PRE_SHUNT_MOSFET_BANK_3: U1_MOSFET_BANK_3.1 U1_MOSFET_BANK_3.2 U2_MOSFET_BANK_3.18
M1_TRIG_MOSFET_BANK_0: R1_MOSFET_BANK_0.2 U2_MOSFET_BANK_0.3 | length 3.9
  TOP SIG w0.2: R1_MOSFET_BANK_0.2@63.15,63 63.45,62.7 63.45,62.5 65.275,60.675 U2_MOSFET_BANK_0.3@65.95,60.675
M1_TRIG_MOSFET_BANK_1: R1_MOSFET_BANK_1.2 U2_MOSFET_BANK_1.3 | length 3.9
  TOP SIG w0.2: R1_MOSFET_BANK_1.2@63.15,47 63.45,46.7 63.45,46.5 65.275,44.675 U2_MOSFET_BANK_1.3@65.95,44.675
M1_TRIG_MOSFET_BANK_2: R1_MOSFET_BANK_2.2 U2_MOSFET_BANK_2.3 | length 3.9
  TOP SIG w0.2: R1_MOSFET_BANK_2.2@63.15,31 63.45,30.7 63.45,30.5 65.275,28.675 U2_MOSFET_BANK_2.3@65.95,28.675
M1_TRIG_MOSFET_BANK_3: R1_MOSFET_BANK_3.2 U2_MOSFET_BANK_3.3 | length 3.9
  TOP SIG w0.2: R1_MOSFET_BANK_3.2@63.15,15 63.45,14.7 63.45,14.5 65.275,12.675 U2_MOSFET_BANK_3.3@65.95,12.675
M2: C100.2 U18.4 U18.11 | length 11.2
  TOP SIG w0.3: C100.2@3.979,133.5 4.786,133.5 6.564,135.278 U18.11@7.78,135.278 ; U18.11@7.78,135.318 7.82,135.358 8.824,135.358 9,135.533 9,139.547 8.824,139.723 7.82,139.723 U18.4@7.78,139.763
M2_I_SENSE_MOSFET_BANK_0: R15_MOSFET_BANK_0.2 U3_MOSFET_BANK_0.7 | length 5.4
  BOT SIG w0.2: U3_MOSFET_BANK_0.7@84.316,58.365 86.407,58.365 86.58,58.538 88.887,58.538 89.35,58.075 R15_MOSFET_BANK_0.2@89.35,58
M2_I_SENSE_MOSFET_BANK_1: R15_MOSFET_BANK_1.2 U3_MOSFET_BANK_1.7 | length 5.4
  BOT SIG w0.2: U3_MOSFET_BANK_1.7@84.316,42.365 86.407,42.365 86.58,42.538 88.887,42.538 89.35,42.075 R15_MOSFET_BANK_1.2@89.35,42
M2_I_SENSE_MOSFET_BANK_2: R15_MOSFET_BANK_2.2 U3_MOSFET_BANK_2.7 | length 5.4
  BOT SIG w0.2: U3_MOSFET_BANK_2.7@84.316,26.365 86.407,26.365 86.58,26.538 88.887,26.538 89.35,26.075 R15_MOSFET_BANK_2.2@89.35,26
M2_I_SENSE_MOSFET_BANK_3: R15_MOSFET_BANK_3.2 U3_MOSFET_BANK_3.7 | length 5.4
  BOT SIG w0.2: U3_MOSFET_BANK_3.7@84.316,10.365 86.407,10.365 86.58,10.538 88.887,10.538 89.35,10.075 R15_MOSFET_BANK_3.2@89.35,10
M2_OUT_MOSFET_BANK_0: F3_MOSFET_BANK_0.1 R19_MOSFET_BANK_0.2 U3_MOSFET_BANK_0.3 U3_MOSFET_BANK_0.4 | length 2.8
  BOT SIG w0.2: R19_MOSFET_BANK_0.2@86.85,60 86.85,61.239 87.666,62.056 F3_MOSFET_BANK_0.1@87.666,62.5
M2_OUT_MOSFET_BANK_1: F3_MOSFET_BANK_1.1 R19_MOSFET_BANK_1.2 U3_MOSFET_BANK_1.3 U3_MOSFET_BANK_1.4 | length 2.8
  BOT SIG w0.2: R19_MOSFET_BANK_1.2@86.85,44 86.85,45.239 87.666,46.056 F3_MOSFET_BANK_1.1@87.666,46.5
M2_OUT_MOSFET_BANK_2: F3_MOSFET_BANK_2.1 R19_MOSFET_BANK_2.2 U3_MOSFET_BANK_2.3 U3_MOSFET_BANK_2.4 | length 2.8
  BOT SIG w0.2: R19_MOSFET_BANK_2.2@86.85,28 86.85,29.239 87.666,30.056 F3_MOSFET_BANK_2.1@87.666,30.5
M2_OUT_MOSFET_BANK_3: F3_MOSFET_BANK_3.1 R19_MOSFET_BANK_3.2 U3_MOSFET_BANK_3.3 U3_MOSFET_BANK_3.4 | length 2.8
  BOT SIG w0.2: R19_MOSFET_BANK_3.2@86.85,12 86.85,13.239 87.666,14.056 F3_MOSFET_BANK_3.1@87.666,14.5
M2_PRE_SHUNT_MOSFET_BANK_0: U2_MOSFET_BANK_0.17 U3_MOSFET_BANK_0.1 U3_MOSFET_BANK_0.2
  other v2: 77.75,59.25
M2_PRE_SHUNT_MOSFET_BANK_1: U2_MOSFET_BANK_1.17 U3_MOSFET_BANK_1.1 U3_MOSFET_BANK_1.2
  other v2: 77.75,43.25
M2_PRE_SHUNT_MOSFET_BANK_2: U2_MOSFET_BANK_2.17 U3_MOSFET_BANK_2.1 U3_MOSFET_BANK_2.2
  other v2: 77.75,27.25
M2_PRE_SHUNT_MOSFET_BANK_3: U2_MOSFET_BANK_3.17 U3_MOSFET_BANK_3.1 U3_MOSFET_BANK_3.2
  other v2: 77.75,11.25
M2_TRIG_MOSFET_BANK_0: R2_MOSFET_BANK_0.2 U2_MOSFET_BANK_0.5 | length 3
  TOP SIG w0.2: R2_MOSFET_BANK_0.2@63.15,58.5 63.15,58.435 63.45,58.135 U2_MOSFET_BANK_0.5@65.95,58.135
M2_TRIG_MOSFET_BANK_1: R2_MOSFET_BANK_1.2 U2_MOSFET_BANK_1.5 | length 3
  TOP SIG w0.2: R2_MOSFET_BANK_1.2@63.15,42.5 63.15,42.435 63.45,42.135 U2_MOSFET_BANK_1.5@65.95,42.135
M2_TRIG_MOSFET_BANK_2: R2_MOSFET_BANK_2.2 U2_MOSFET_BANK_2.5 | length 3
  TOP SIG w0.2: R2_MOSFET_BANK_2.2@63.15,26.5 63.15,26.435 63.45,26.135 U2_MOSFET_BANK_2.5@65.95,26.135
M2_TRIG_MOSFET_BANK_3: R2_MOSFET_BANK_3.2 U2_MOSFET_BANK_3.5 | length 3
  TOP SIG w0.2: R2_MOSFET_BANK_3.2@63.15,10.5 63.15,10.435 63.45,10.135 U2_MOSFET_BANK_3.5@65.95,10.135
M3_I_SENSE_MOSFET_BANK_0: R14_MOSFET_BANK_0.2 U4_MOSFET_BANK_0.7 | length 5.8
  TOP SIG w0.2: U4_MOSFET_BANK_0.7@84.316,54.635 85.615,54.635 86.25,54 88.425,54 89.35,54.925 R14_MOSFET_BANK_0.2@89.35,55
M3_I_SENSE_MOSFET_BANK_1: R14_MOSFET_BANK_1.2 U4_MOSFET_BANK_1.7 | length 5.8
  TOP SIG w0.2: U4_MOSFET_BANK_1.7@84.316,38.635 85.615,38.635 86.25,38 88.425,38 89.35,38.925 R14_MOSFET_BANK_1.2@89.35,39
M3_I_SENSE_MOSFET_BANK_2: R14_MOSFET_BANK_2.2 U4_MOSFET_BANK_2.7 | length 5.8
  TOP SIG w0.2: U4_MOSFET_BANK_2.7@84.316,22.635 85.615,22.635 86.25,22 88.425,22 89.35,22.925 R14_MOSFET_BANK_2.2@89.35,23
M3_I_SENSE_MOSFET_BANK_3: R14_MOSFET_BANK_3.2 U4_MOSFET_BANK_3.7 | length 5.8
  TOP SIG w0.2: U4_MOSFET_BANK_3.7@84.316,6.635 85.615,6.635 86.25,6 88.425,6 89.35,6.925 R14_MOSFET_BANK_3.2@89.35,7
M3_OUT_MOSFET_BANK_0: F4_MOSFET_BANK_0.1 R20_MOSFET_BANK_0.2 U4_MOSFET_BANK_0.3 U4_MOSFET_BANK_0.4 | length 2.8
  TOP SIG w0.2: R20_MOSFET_BANK_0.2@86.85,53 86.85,51.761 87.666,50.945 F4_MOSFET_BANK_0.1@87.666,50.5
M3_OUT_MOSFET_BANK_1: F4_MOSFET_BANK_1.1 R20_MOSFET_BANK_1.2 U4_MOSFET_BANK_1.3 U4_MOSFET_BANK_1.4 | length 2.8
  TOP SIG w0.2: R20_MOSFET_BANK_1.2@86.85,37 86.85,35.761 87.666,34.945 F4_MOSFET_BANK_1.1@87.666,34.5
M3_OUT_MOSFET_BANK_2: F4_MOSFET_BANK_2.1 R20_MOSFET_BANK_2.2 U4_MOSFET_BANK_2.3 U4_MOSFET_BANK_2.4 | length 2.8
  TOP SIG w0.2: R20_MOSFET_BANK_2.2@86.85,21 86.85,19.761 87.666,18.945 F4_MOSFET_BANK_2.1@87.666,18.5
M3_OUT_MOSFET_BANK_3: F4_MOSFET_BANK_3.1 R20_MOSFET_BANK_3.2 U4_MOSFET_BANK_3.3 U4_MOSFET_BANK_3.4 | length 2.8
  TOP SIG w0.2: R20_MOSFET_BANK_3.2@86.85,5 86.85,3.761 87.666,2.945 F4_MOSFET_BANK_3.1@87.666,2.5
M3_PRE_SHUNT_MOSFET_BANK_0: U2_MOSFET_BANK_0.14 U4_MOSFET_BANK_0.1 U4_MOSFET_BANK_0.2
M3_PRE_SHUNT_MOSFET_BANK_1: U2_MOSFET_BANK_1.14 U4_MOSFET_BANK_1.1 U4_MOSFET_BANK_1.2
M3_PRE_SHUNT_MOSFET_BANK_2: U2_MOSFET_BANK_2.14 U4_MOSFET_BANK_2.1 U4_MOSFET_BANK_2.2
M3_PRE_SHUNT_MOSFET_BANK_3: U2_MOSFET_BANK_3.14 U4_MOSFET_BANK_3.1 U4_MOSFET_BANK_3.2
M3_TRIG_MOSFET_BANK_0: R3_MOSFET_BANK_0.2 U2_MOSFET_BANK_0.7 | length 3.4
  TOP SIG w0.2: R3_MOSFET_BANK_0.2@63.15,57 63.15,56.925 64.48,55.595 U2_MOSFET_BANK_0.7@65.95,55.595
M3_TRIG_MOSFET_BANK_1: R3_MOSFET_BANK_1.2 U2_MOSFET_BANK_1.7 | length 3.4
  TOP SIG w0.2: R3_MOSFET_BANK_1.2@63.15,41 63.15,40.925 64.48,39.595 U2_MOSFET_BANK_1.7@65.95,39.595
M3_TRIG_MOSFET_BANK_2: R3_MOSFET_BANK_2.2 U2_MOSFET_BANK_2.7 | length 3.4
  TOP SIG w0.2: R3_MOSFET_BANK_2.2@63.15,25 63.15,24.925 64.48,23.595 U2_MOSFET_BANK_2.7@65.95,23.595
M3_TRIG_MOSFET_BANK_3: R3_MOSFET_BANK_3.2 U2_MOSFET_BANK_3.7 | length 3.4
  TOP SIG w0.2: R3_MOSFET_BANK_3.2@63.15,9 63.87,9 65.275,7.595 U2_MOSFET_BANK_3.7@65.95,7.595
M4_I_SENSE_MOSFET_BANK_0: R13_MOSFET_BANK_0.2 U5_MOSFET_BANK_0.7 | length 5.4
  BOT SIG w0.2: U5_MOSFET_BANK_0.7@84.316,51.365 86.407,51.365 86.58,51.538 88.887,51.538 89.35,51.075 R13_MOSFET_BANK_0.2@89.35,51
M4_I_SENSE_MOSFET_BANK_1: R13_MOSFET_BANK_1.2 U5_MOSFET_BANK_1.7 | length 5.4
  BOT SIG w0.2: U5_MOSFET_BANK_1.7@84.316,35.365 86.407,35.365 86.58,35.538 88.887,35.538 89.35,35.075 R13_MOSFET_BANK_1.2@89.35,35
M4_I_SENSE_MOSFET_BANK_2: R13_MOSFET_BANK_2.2 U5_MOSFET_BANK_2.7 | length 5.4
  BOT SIG w0.2: U5_MOSFET_BANK_2.7@84.316,19.365 86.407,19.365 86.58,19.538 88.887,19.538 89.35,19.075 R13_MOSFET_BANK_2.2@89.35,19
M4_I_SENSE_MOSFET_BANK_3: R13_MOSFET_BANK_3.2 U5_MOSFET_BANK_3.7 | length 5.4
  BOT SIG w0.2: U5_MOSFET_BANK_3.7@84.316,3.365 86.407,3.365 86.58,3.538 88.887,3.538 89.35,3.075 R13_MOSFET_BANK_3.2@89.35,3
M4_OUT_MOSFET_BANK_0: F5_MOSFET_BANK_0.1 R21_MOSFET_BANK_0.2 U5_MOSFET_BANK_0.3 U5_MOSFET_BANK_0.4 | length 2.8
  BOT SIG w0.2: R21_MOSFET_BANK_0.2@86.85,53 86.85,54.239 87.666,55.056 F5_MOSFET_BANK_0.1@87.666,55.5
M4_OUT_MOSFET_BANK_1: F5_MOSFET_BANK_1.1 R21_MOSFET_BANK_1.2 U5_MOSFET_BANK_1.3 U5_MOSFET_BANK_1.4 | length 2.8
  BOT SIG w0.2: R21_MOSFET_BANK_1.2@86.85,37 86.85,38.239 87.666,39.056 F5_MOSFET_BANK_1.1@87.666,39.5
M4_OUT_MOSFET_BANK_2: F5_MOSFET_BANK_2.1 R21_MOSFET_BANK_2.2 U5_MOSFET_BANK_2.3 U5_MOSFET_BANK_2.4 | length 2.8
  BOT SIG w0.2: R21_MOSFET_BANK_2.2@86.85,21 86.85,22.239 87.666,23.056 F5_MOSFET_BANK_2.1@87.666,23.5
M4_OUT_MOSFET_BANK_3: F5_MOSFET_BANK_3.1 R21_MOSFET_BANK_3.2 U5_MOSFET_BANK_3.3 U5_MOSFET_BANK_3.4 | length 2.8
  BOT SIG w0.2: R21_MOSFET_BANK_3.2@86.85,5 86.85,6.239 87.666,7.056 F5_MOSFET_BANK_3.1@87.666,7.5
M4_PRE_SHUNT_MOSFET_BANK_0: U2_MOSFET_BANK_0.13 U5_MOSFET_BANK_0.1 U5_MOSFET_BANK_0.2
  other v2: 77.75,54.25
M4_PRE_SHUNT_MOSFET_BANK_1: U2_MOSFET_BANK_1.13 U5_MOSFET_BANK_1.1 U5_MOSFET_BANK_1.2
  other v2: 77.75,38.25
M4_PRE_SHUNT_MOSFET_BANK_2: U2_MOSFET_BANK_2.13 U5_MOSFET_BANK_2.1 U5_MOSFET_BANK_2.2
  other v2: 77.75,22.25
M4_PRE_SHUNT_MOSFET_BANK_3: U2_MOSFET_BANK_3.13 U5_MOSFET_BANK_3.1 U5_MOSFET_BANK_3.2
  other v2: 77.75,6.25
M4_TRIG_MOSFET_BANK_0: R4_MOSFET_BANK_0.2 U2_MOSFET_BANK_0.9 | length 3.1
  TOP SIG w0.2: R4_MOSFET_BANK_0.2@63.15,52.5 63.15,52.575 63.63,53.055 U2_MOSFET_BANK_0.9@65.95,53.055
M4_TRIG_MOSFET_BANK_1: R4_MOSFET_BANK_1.2 U2_MOSFET_BANK_1.9 | length 3.1
  TOP SIG w0.2: R4_MOSFET_BANK_1.2@63.15,36.5 63.15,36.575 63.63,37.055 U2_MOSFET_BANK_1.9@65.95,37.055
M4_TRIG_MOSFET_BANK_2: R4_MOSFET_BANK_2.2 U2_MOSFET_BANK_2.9 | length 3.1
  TOP SIG w0.2: R4_MOSFET_BANK_2.2@63.15,20.5 63.15,20.575 63.63,21.055 U2_MOSFET_BANK_2.9@65.95,21.055
M4_TRIG_MOSFET_BANK_3: R4_MOSFET_BANK_3.2 U2_MOSFET_BANK_3.9 | length 3.1
  TOP SIG w0.2: R4_MOSFET_BANK_3.2@63.15,4.5 63.15,4.575 63.63,5.055 U2_MOSFET_BANK_3.9@65.95,5.055
MAIN_I_SENSE: R61_ADC_1.3 R63.1 | length 106.4
  BOT SIG w0.3: v1(44.4,47.702) 45.645,48.947 45.761,48.947 47.844,51.03 47.844,60.002 51.205,63.363 51.205,71.637 51.198,71.643 51.198,78.634 50.303,79.529 45.606,84.226 45.606,90.859 47.989,93.242 55.91,93.242 58.405,95.737 58.405,103.673 62.429,107.697 77.621,107.697 82.402,102.916 82.402,99.523 85.35,96.575 R63.1@85.35,96.5
MAIN_V_SENSE: D45.1 R29.1 R31.2 R61_ADC_1.4 | length 102.6
  BOT SIG w0.3: v1(45.194,47.708) 45.208,47.708 48.245,50.745 48.245,59.836 51.606,63.197 51.606,71.803 51.6,71.81 51.6,78.8 46.008,84.392 46.008,90.693 48.156,92.84 56.14,92.84 58.806,95.506 58.806,103.506 62.595,107.295 77.455,107.295 81.65,103.1 81.65,101 81.655,100.995 81.655,99.505 81.4,99.25 81.4,99.125 80.35,98.075 R29.1@80.35,98
MOS_SENSE_3V3: C1_MOSFET_BANK_0.1 C1_MOSFET_BANK_1.1 C1_MOSFET_BANK_2.1 C1_MOSFET_BANK_3.1 C2_MOSFET_BANK_0.1 C2_MOSFET_BANK_1.1 C2_MOSFET_BANK_2.1 C2_MOSFET_BANK_3.1 C3_MOSFET_BANK_0.1 C3_MOSFET_BANK_1.1 C3_MOSFET_BANK_2.1 C3_MOSFET_BANK_3.1 C4_MOSFET_BANK_0.1 C4_MOSFET_BANK_1.1 C4_MOSFET_BANK_2.1 C4_MOSFET_BANK_3.1 F9.2 U1_MOSFET_BANK_0.8 U1_MOSFET_BANK_1.8 U1_MOSFET_BANK_2.8 U1_MOSFET_BANK_3.8 U3_MOSFET_BANK_0.8 U3_MOSFET_BANK_1.8 U3_MOSFET_BANK_2.8 U3_MOSFET_BANK_3.8 U4_MOSFET_BANK_0.8 U4_MOSFET_BANK_1.8 U4_MOSFET_BANK_2.8 U4_MOSFET_BANK_3.8 U5_MOSFET_BANK_0.8 U5_MOSFET_BANK_1.8 U5_MOSFET_BANK_2.8 U5_MOSFET_BANK_3.8 | length 216.2
  TOP SIG w0.3: v1(82.5,5.5) 82.5,6.755 83.65,7.905 U4_MOSFET_BANK_3.8@84.316,7.905 86.095,7.905 87,7 C2_MOSFET_BANK_3.1@87.021,7 ; v1(82.5,12.5) 82.5,13.755 83.65,14.905 U1_MOSFET_BANK_3.8@84.316,14.905 86.095,14.905 87,14 C1_MOSFET_BANK_3.1@87.021,14 ; v1(82.5,21.5) 82.5,22.755 83.65,23.905 U4_MOSFET_BANK_2.8@84.316,23.905 86.095,23.905 87,23 C2_MOSFET_BANK_2.1@87.021,23 ; v1(82.5,28.5) 82.5,29.755 83.65,30.905 U1_MOSFET_BANK_2.8@84.316,30.905 86.095,30.905 87,30 C1_MOSFET_BANK_2.1@87.021,30 ; v1(82.5,37.5) 82.5,38.755 83.65,39.905 U4_MOSFET_BANK_1.8@84.316,39.905 86.095,39.905 87,39 C2_MOSFET_BANK_1.1@87.021,39 ; v1(82.5,44.5) 82.5,45.755 83.65,46.905 U1_MOSFET_BANK_1.8@84.316,46.905 86.095,46.905 87,46 C1_MOSFET_BANK_1.1@87.021,46 ; v1(82.5,53.5) 82.5,54.755 83.65,55.905 U4_MOSFET_BANK_0.8@84.316,55.905 86.095,55.905 87,55 C2_MOSFET_BANK_0.1@87.021,55 ; v1(82.5,60.448) 82.5,61.755 83.65,62.905 U1_MOSFET_BANK_0.8@84.316,62.905 86.095,62.905 87,62 C1_MOSFET_BANK_0.1@87.021,62
  GND w0.75: v4(64.25,69.5) 66.75,67 80.25,67 v1(82.25,65)
  PWR w0.75: v1(82.25,65) 82.5,64.75 v1(82.5,60.448) ; v1@82.497,5.51 83.297,6.31 83.297,12.07 82.857,12.51 82.497,12.51 83.297,13.31 83.297,21.07 82.857,21.51 82.497,21.51 83.397,22.41 83.397,27.991 82.878,28.51 82.497,28.51 83.397,29.41 83.397,36.909 82.797,37.51 82.497,37.51 83.497,38.51 83.497,43.83 82.817,44.51 82.497,44.51 83.397,45.41 83.397,53.07 82.957,53.51 82.497,53.51 82.727,53.74 83.397,54.41 83.397,60.07 82.957,60.51 v1@82.5,60.51
  BOT SIG w0.3: v1(82.5,5.5) 81.5,4.5 81.5,2.271 81.676,2.095 U5_MOSFET_BANK_3.8@84.316,2.095 86.095,2.095 87,3 C4_MOSFET_BANK_3.1@87.021,3 ; v1(82.5,12.5) 81.5,11.5 81.5,9.271 81.676,9.095 U3_MOSFET_BANK_3.8@84.316,9.095 86.095,9.095 87,10 C3_MOSFET_BANK_3.1@87.021,10 ; v1(82.5,21.5) 81.5,20.5 81.5,18.271 81.676,18.095 U5_MOSFET_BANK_2.8@84.316,18.095 86.095,18.095 87,19 C4_MOSFET_BANK_2.1@87.021,19 ; v1(82.5,28.5) 81.5,27.5 81.5,25.271 81.676,25.095 U3_MOSFET_BANK_2.8@84.316,25.095 86.095,25.095 87,26 C3_MOSFET_BANK_2.1@87.021,26 ; v1(82.5,37.5) 81.5,36.5 81.5,34.271 81.676,34.095 U5_MOSFET_BANK_1.8@84.316,34.095 86.095,34.095 87,35 C4_MOSFET_BANK_1.1@87.021,35 ; v1(82.5,44.5) 81.5,43.5 81.5,41.271 81.676,41.095 U3_MOSFET_BANK_1.8@84.316,41.095 86.095,41.095 87,42 C3_MOSFET_BANK_1.1@87.021,42 ; v1(82.5,53.5) 81.5,52.5 81.5,50.271 81.676,50.095 U5_MOSFET_BANK_0.8@84.316,50.095 86.095,50.095 87,51 C4_MOSFET_BANK_0.1@87.021,51 ; v1(82.5,60.448) 82.448,60.448 81.5,59.5 81.5,57.271 81.676,57.095 U3_MOSFET_BANK_0.8@84.316,57.095 86.095,57.095 87,58 C3_MOSFET_BANK_0.1@87.021,58
MOS_TEMP_0: R11_MOSFET_BANK_0.2 R12_MOSFET_BANK_0.2 R64.4 | length 24.6
  TOP SIG w0.3: R64.4@50.1,66.95 51,66.95 51.7,66.25 v1(52.25,66.25)
  BOT SIG w0.3: v1(52.25,66.25) 60.75,66.25 67,60 R11_MOSFET_BANK_0.2@69.8,60 ; R12_MOSFET_BANK_0.2@69.25,58.15 69.25,59.4 R11_MOSFET_BANK_0.2@69.8,59.95
MOS_TEMP_1: R11_MOSFET_BANK_1.2 R12_MOSFET_BANK_1.2 R64.3 | length 39.8
  TOP SIG w0.3: R64.3@50.1,66.15 50.85,66.15 51.475,65.525 52.225,65.525 v1(52.236,65.514)
  BOT SIG w0.3: v1(52.236,65.514) 52.29,65.514 52.476,65.7 52.478,65.7 52.626,65.848 60.584,65.848 65,61.432 65,46.75 67.75,44 R11_MOSFET_BANK_1.2@69.8,44 69.8,43.95 69.25,43.4 R12_MOSFET_BANK_1.2@69.25,42.15
MOS_TEMP_2: R11_MOSFET_BANK_2.2 R12_MOSFET_BANK_2.2 R64.2 | length 56.3
  TOP SIG w0.3: R64.2@50.1,65.35 50.163,65.287 50.713,65.287 51.25,64.75 v1(52.25,64.75)
  BOT SIG w0.3: v1(52.25,64.75) 52.947,65.447 60.417,65.447 64.598,61.266 64.598,29.689 66.287,28 R11_MOSFET_BANK_2.2@69.8,28 69.8,27.95 69.25,27.4 R12_MOSFET_BANK_2.2@69.25,26.15
MOS_TEMP_3: R11_MOSFET_BANK_3.2 R12_MOSFET_BANK_3.2 R64.1 | length 71.2
  TOP SIG w0.3: R64.1@50.1,64.55 50.163,64.487 50.513,64.487 51.712,63.288 52.212,63.288 v1(52.25,63.25)
  BOT SIG w0.3: v1(52.25,63.25) 52.288,63.212 52.513,63.212 54.225,61.5 63.75,61.5 64.197,61.053 64.197,13.803 66,12 R11_MOSFET_BANK_3.2@69.8,12 69.8,11.95 69.25,11.4 R12_MOSFET_BANK_3.2@69.25,10.15
NetC6_MOSFET_BANK_0_1: C6_MOSFET_BANK_0.1 C7_MOSFET_BANK_0.1 R16_MOSFET_BANK_0.2 U6_MOSFET_BANK_0.13 | length 10.4
  BOT SIG w0.3: R16_MOSFET_BANK_0.2@67.85,55 67.85,54.925 68.771,54.004 68.771,53.186 68.957,53 C7_MOSFET_BANK_0.1@68.979,53 C6_MOSFET_BANK_0.1@68.979,50.25 69,50.25 70.25,49 72.324,49 72.665,49.341 72.665,50.191 U6_MOSFET_BANK_0.13@72.675,50.2
NetC6_MOSFET_BANK_1_1: C6_MOSFET_BANK_1.1 C7_MOSFET_BANK_1.1 R16_MOSFET_BANK_1.2 U6_MOSFET_BANK_1.13 | length 10.4
  BOT SIG w0.3: R16_MOSFET_BANK_1.2@67.85,39 67.85,38.925 68.771,38.004 68.771,37.186 68.957,37 C7_MOSFET_BANK_1.1@68.979,37 C6_MOSFET_BANK_1.1@68.979,34.25 69,34.25 70.25,33 72.324,33 72.665,33.341 72.665,34.191 U6_MOSFET_BANK_1.13@72.675,34.2
NetC6_MOSFET_BANK_2_1: C6_MOSFET_BANK_2.1 C7_MOSFET_BANK_2.1 R16_MOSFET_BANK_2.2 U6_MOSFET_BANK_2.13 | length 10.4
  BOT SIG w0.3: R16_MOSFET_BANK_2.2@67.85,23 67.85,22.925 68.771,22.004 68.771,21.186 68.957,21 C7_MOSFET_BANK_2.1@68.979,21 C6_MOSFET_BANK_2.1@68.979,18.25 69,18.25 70.25,17 72.324,17 72.665,17.341 72.665,18.191 U6_MOSFET_BANK_2.13@72.675,18.2
NetC6_MOSFET_BANK_3_1: C6_MOSFET_BANK_3.1 C7_MOSFET_BANK_3.1 R16_MOSFET_BANK_3.2 U6_MOSFET_BANK_3.13 | length 10.4
  BOT SIG w0.3: R16_MOSFET_BANK_3.2@67.85,7 67.85,6.925 68.771,6.004 68.771,5.186 68.957,5 C7_MOSFET_BANK_3.1@68.979,5 C6_MOSFET_BANK_3.1@68.979,2.25 69,2.25 70.25,1 72.324,1 72.665,1.341 72.665,2.191 U6_MOSFET_BANK_3.13@72.675,2.2
NetC11_1: C11.1 D2.1 R33.2 U8.10 | length 241.3
  TOP SIG w0.3: C11.1@36.479,26 36.497,26.019 36.497,28.455 U8.10@36.5,28.457
  PWR w0.3: v1(5,44.5) 2.902,42.402 2.902,34.198 11.998,25.102 20.734,25.102 23.634,28.002 35.998,28.002 v1(36.75,27.25)
  PWR w0.5: v1(36.75,27.25) 36.75,15.25 36.3,14.8 36.3,12.7 38.8,10.2 38.8,4.5 42.202,1.098 57.25,1.098 101.098,1.098 107.5,7.5 107.5,76.25 101,82.75 v1(93.25,82.75)
  BOT SIG w0.3: D2.1@87.825,84.5 91.5,84.5 v1(93.25,82.75)
NetC13_1: C13.1 R33.1 R34.2 SW1.2 | length 5.1
  TOP SIG w0.2: v1(5,45.5) 6.45,45.5 6.625,45.325 SW1.2@6.625,45
  BOT SIG w0.2: R34.2@3.5,45.65 6.329,45.65 C13.1@6.5,45.479
NetC16_1: C16.1 C41.2 F1.2 U9.3 U11.2 U11.3 | length 11.3
  TOP SIG w0.5: U9.3@55.8,75.1 55.914,74.986 55.914,71.586 56,71.5 C16.1@56.021,71.5
  TOP SIG w1: U9.3@55.8,75.1 55.8,78.487 57.563,80.25 59.246,80.25
NetC32_1: C32.1 C33.1 U10.48 | length 3.6
  TOP SIG w0.3: U10.48@13,47.575 13,46.5 v1(13.75,45.75)
  BOT SIG w0.3: C33.1@13.75,45.479 C32.1@15.25,45.479
NetC34_1: C34.1 C35.1 U10.73 | length 3.5
  TOP SIG w0.3: U10.73@10.425,35 10.438,35.013 11.738,35.013 v1(12.252,35.526)
  BOT SIG w0.3: C35.1@12.25,35.771 C34.1@13.75,35.771